# EAGLE board PCA9548A (EAGLE 6.4)
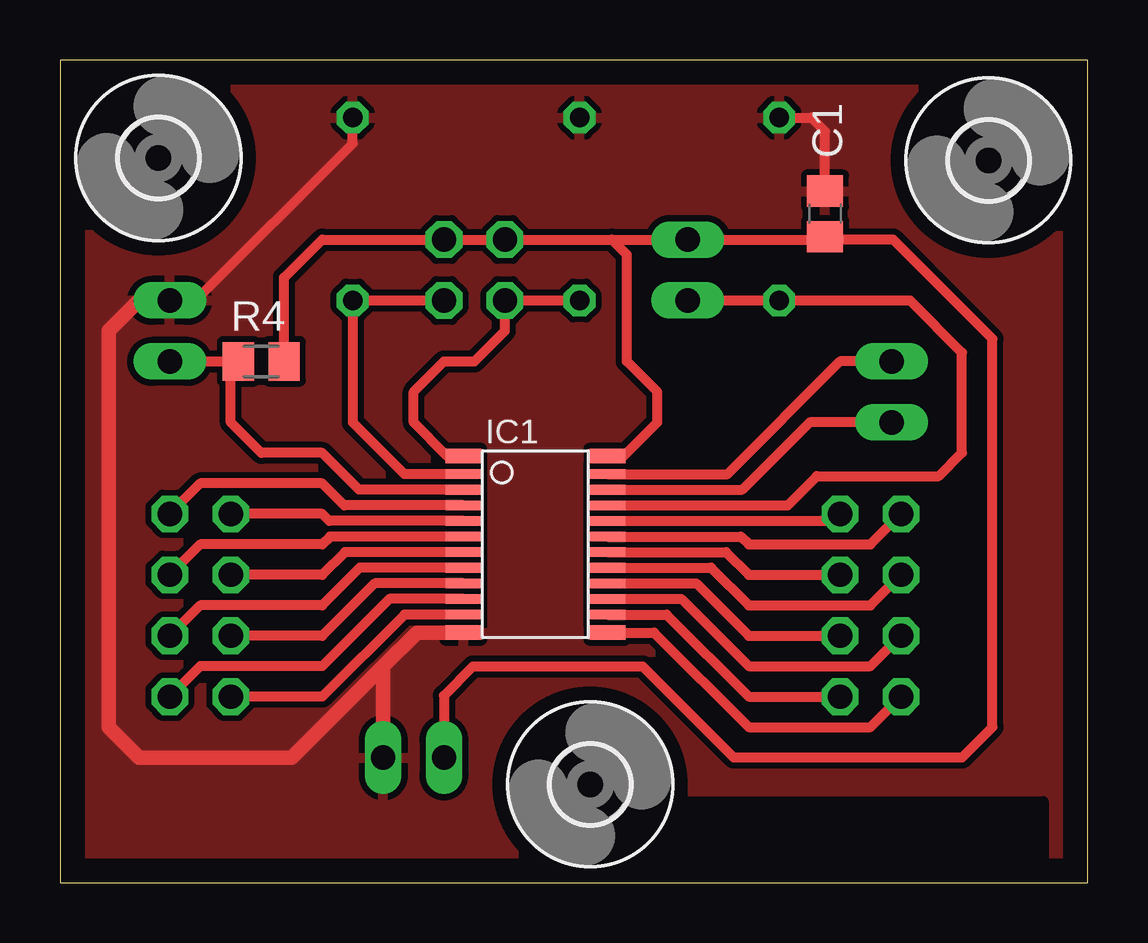
[diagram p0: board, top side]
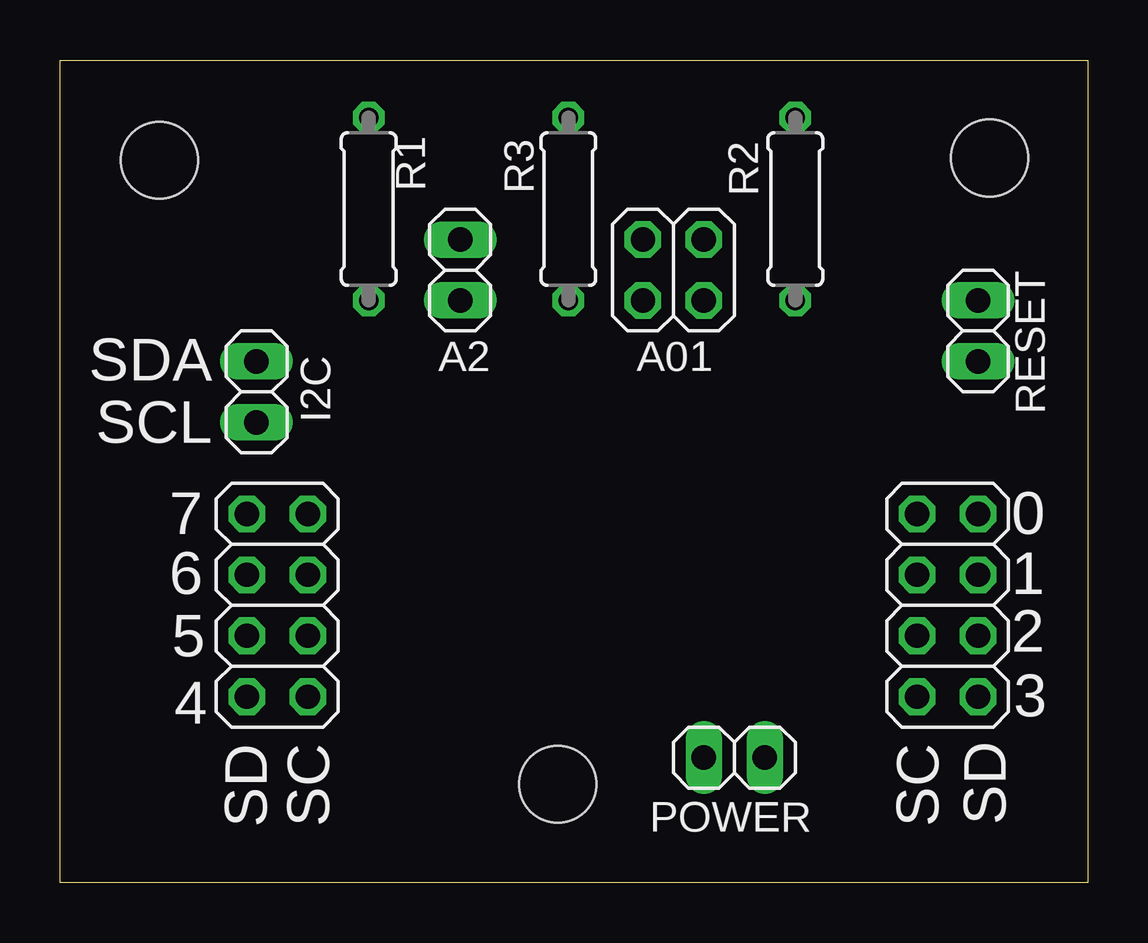
[diagram p1: board, bottom side, seen from below]

Size 42.85 x 34.28 mm. Coordinates in mm from the lower left corner, seen from the top.
Outline: 0,0 42.85,0 42.85,34.28 0,34.28 0,0
Copper layers (1*16): Top 0.035mm / dielectric 1.5mm / Bottom 0.035mm
Design rules "default *": minimum track width 10mil, minimum drill 24mil, track to track 10mil, track to pad 10mil, pad to pad 8mil, via to via 8mil, smd to smd 8mil, copper to edge 40mil, drill to drill 8mil, minimum pad ring 10mil, minimum via ring 8mil, stop-mask expansion 4mil, vias tented up to drill 0mil, thermal gap 10mil
tRestrict: area 26.1,-0.1 to 41,3.4

## Footprints (pad centres in the part's own frame; a part is rotated, then mirrored left to right if it is on the bottom)
2X02 = drill 1.016 octagon: 1 -1.27,-1.27; 2 -1.27,1.27; 3 1.27,-1.27; 4 1.27,1.27
1X02 = drill 1.016 long: 1 -1.27,0; 2 1.27,0
C0805 = smd 1.3 x 1.5: 1 -0.95,0; 2 0.95,0
TSSOP24 = smd 0.6 x 1.5: A0 -3.675,-3; GND 3.675,-3; SD4 3.675,3; VDD -3.675,3 | smd 0.4 x 1.5: A1 -2.925,-3; A2 -1.625,3; NRESET -2.275,-3; SC0 -0.975,-3; SC1 0.325,-3; SC2 1.625,-3; SC3 2.925,-3; SC4 2.925,3; SC5 1.625,3; SC6 0.325,3; SC7 -0.975,3; SCL -2.275,3; SD0 -1.625,-3; SD1 -0.325,-3; SD2 0.975,-3; SD3 2.275,-3; SD5 2.275,3; SD6 0.975,3; SD7 -0.325,3; SDA -2.925,3
2X04 = drill 1.016 octagon: 1 -3.81,-1.27; 2 -3.81,1.27; 3 -1.27,-1.27; 4 -1.27,1.27; 5 1.27,-1.27; 6 1.27,1.27; 7 3.81,-1.27; 8 3.81,1.27
0207/7 = drill 0.813 octagon: 1 -3.81,0; 2 3.81,0
M0805 = smd 1.3 x 1.6: 1 -0.95,0; 2 0.95,0
3,2 = hole 3.2: 0,0

## Placement (x,y rotation side)
A01  [2X02]  17.28,25.53 0 bottom
A2  [1X02]  26.17,25.53 270 bottom
C1  100n  [C0805]  31.89,27.87 90 top
I2C  [1X02]  34.66,20.45 270 bottom
IC1  PCA9548A  [TSSOP24]  19.82,14.1 270 top
JP3  [2X04]  5.85,11.56 270 bottom
JP4  [2X04]  33.79,11.56 270 bottom
POWER  [1X02]  14.74,5.21 180 bottom
R1  10k  [0207/7]  29.98,28.07 270 bottom
R2  10k  [0207/7]  12.2,28.07 270 bottom
R3  10k  [0207/7]  21.66,28.07 270 bottom
R4  10k  [M0805]  8.39,21.72 0 top
RESET  [1X02]  4.58,22.99 270 bottom
U$1  LOGO-COPPER4  [COPPER4]  27.3,0.9 0 top
U$2  [3,2]  22.1,4.1 0 top
U$3  [3,2]  4.1,30.2 0 top
U$4  [3,2]  38.7,30.1 0 top

## Library data of the parts
A01 A2 I2C JP3 JP4 POWER RESET = pinhead
C1 R1-R4 = rcl
IC1 = BEEP
U$1 = Branding
U$2-U$4 = holes

## Nets
A2: A2.2 IC1.A2 R1.2
GND: C1.2 IC1.GND POWER.1 R1.1 R2.1 R3.1 RESET.1
I"C: I2C.1 IC1.SDA
N$3: IC1.NRESET R4.1 RESET.2
N$4: A01.1 IC1.A0 R3.2
N$5: I2C.2 IC1.SCL
N$6: A01.3 IC1.A1 R2.2
SC0: IC1.SC0 JP3.1
SC1: IC1.SC1 JP3.3
SC2: IC1.SC2 JP3.5
SC3: IC1.SC3 JP3.7
SC4: IC1.SC4 JP4.8
SC5: IC1.SC5 JP4.6
SC6: IC1.SC6 JP4.4
SC7: IC1.SC7 JP4.2
SD0: IC1.SD0 JP3.2
SD1: IC1.SD1 JP3.4
SD2: IC1.SD2 JP3.6
SD3: IC1.SD3 JP3.8
SD4: IC1.SD4 JP4.7
SD5: IC1.SD5 JP4.5
SD6: IC1.SD6 JP4.3
SD7: IC1.SD7 JP4.1
VCC: A01.2 A01.4 A2.1 C1.1 IC1.VDD POWER.2 R4.2

## Tracks (layer width: path | path; a pad name or v marks a point on that pad's centre or on a via)
A2
  Top 0.406: IC1.A2 30.34,15.72 31.55,16.94 36.63,16.94 37.6,17.91 37.6,22.09 35.43,24.26 R1.2 A2.2
GND
  Top 0.406: C1.2 31.89,31.31 31.32,31.88 R1.1 | R2.1 12.2,30.8 5.66,24.26 RESET.1
  Top 0.61: IC1.GND 14.88,10.43 13.47,9.02 | RESET.1 3.31,24.26 2.04,22.99 2.04,6.48 3.31,5.21 9.66,5.21 13.47,9.02 | POWER.1 13.47,9.02
  pour Top: 0,34.29 42.88,34.29 42.88,0 0,0
I"C
  Top 0.406: IC1.SDA 27.82,17.02 32.52,21.72 I2C.1
N$3
  Top 0.406: RESET.2 R4.1 7.12,21.4 7.12,19.18 8.39,17.91 10.93,17.91 12.46,16.38 IC1.NRESET
N$4
  Top 0.406: IC1.A0 16.14,17.77 14.74,19.18 14.74,20.45 16.01,21.72 17.28,21.72 18.55,22.99 A01.1 R3.2
N$5
  Top 0.406: IC1.SCL 28.45,16.38 31.25,19.18 I2C.2
N$6
  Top 0.406: A01.3 R2.2 12.2,19.18 14.36,17.02 IC1.A1
SC0
  Top 0.406: JP3.1 10.93,15.37 11.22,15.07 IC1.SC0
SC1
  Top 0.406: JP3.3 10.93,12.83 11.88,13.78 IC1.SC1
SC2
  Top 0.406: JP3.5 10.93,10.29 13.12,12.47 IC1.SC2
SC3
  Top 0.406: JP3.7 10.93,7.75 14.36,11.18 IC1.SC3
SC4
  Top 0.406: IC1.SC4 25.29,11.18 28.71,7.75 JP4.8
SC5
  Top 0.406: IC1.SC5 26.52,12.47 28.71,10.29 JP4.6
SC6
  Top 0.406: IC1.SC6 27.77,13.78 28.71,12.83 JP4.4
SC7
  Top 0.406: IC1.SC7 32.23,15.07 JP4.2
SD0
  Top 0.406: JP3.2 5.85,16.64 10.93,16.64 11.85,15.72 IC1.SD0
SD1
  Top 0.406: JP3.4 5.85,14.1 10.93,14.1 11.26,14.43 IC1.SD1
SD2
  Top 0.406: JP3.6 5.85,11.56 10.93,11.56 12.49,13.12 IC1.SD2
SD3
  Top 0.406: JP3.8 5.85,9.02 10.93,9.02 13.73,11.82 IC1.SD3
SD4
  Top 0.406: IC1.SD4 24.77,10.43 28.71,6.48 33.79,6.48 JP4.7
SD5
  Top 0.406: IC1.SD5 25.91,11.82 28.71,9.02 33.79,9.02 JP4.5
SD6
  Top 0.406: IC1.SD6 27.14,13.12 28.71,11.56 33.79,11.56 JP4.3
SD7
  Top 0.406: IC1.SD7 28.39,14.43 28.71,14.1 33.79,14.1 JP4.1
VCC
  Top 0.406: IC1.VDD 23.5,17.77 24.9,19.18 24.9,20.45 23.63,21.72 23.63,26.17 23,26.8 | 31.99,26.8 34.73,26.8 38.87,22.66 38.87,6.48 37.6,5.21 28.09,5.21 24.3,9 17.2,9 16,7.8 POWER.2 | R4.2 9.34,25.21 10.93,26.8 A01.4 A01.2 23,26.8 | C1.1 31.99,26.8 | 23,26.8 A2.1 31.99,26.8

## Text on the board
bNames: SDA | SCL | 0 | 7 | 1 | 6 | 2 | 5 | 3 | 4 | SD | SC | SC | SD
tCName: PCA9548A / v0.1.1